# Altium PCB MyPro.PcbDoc
Units mil, origin at the board's own origin, x right, y up, seen from the top; angles counter-clockwise.
Board outline 2055 x 3355 mil, 2 copper layers (Top Layer, Bottom Layer); 76 components, 78 nets, 359 pads, 87 vias.
Unrouted connection lines stored in the file: 18.
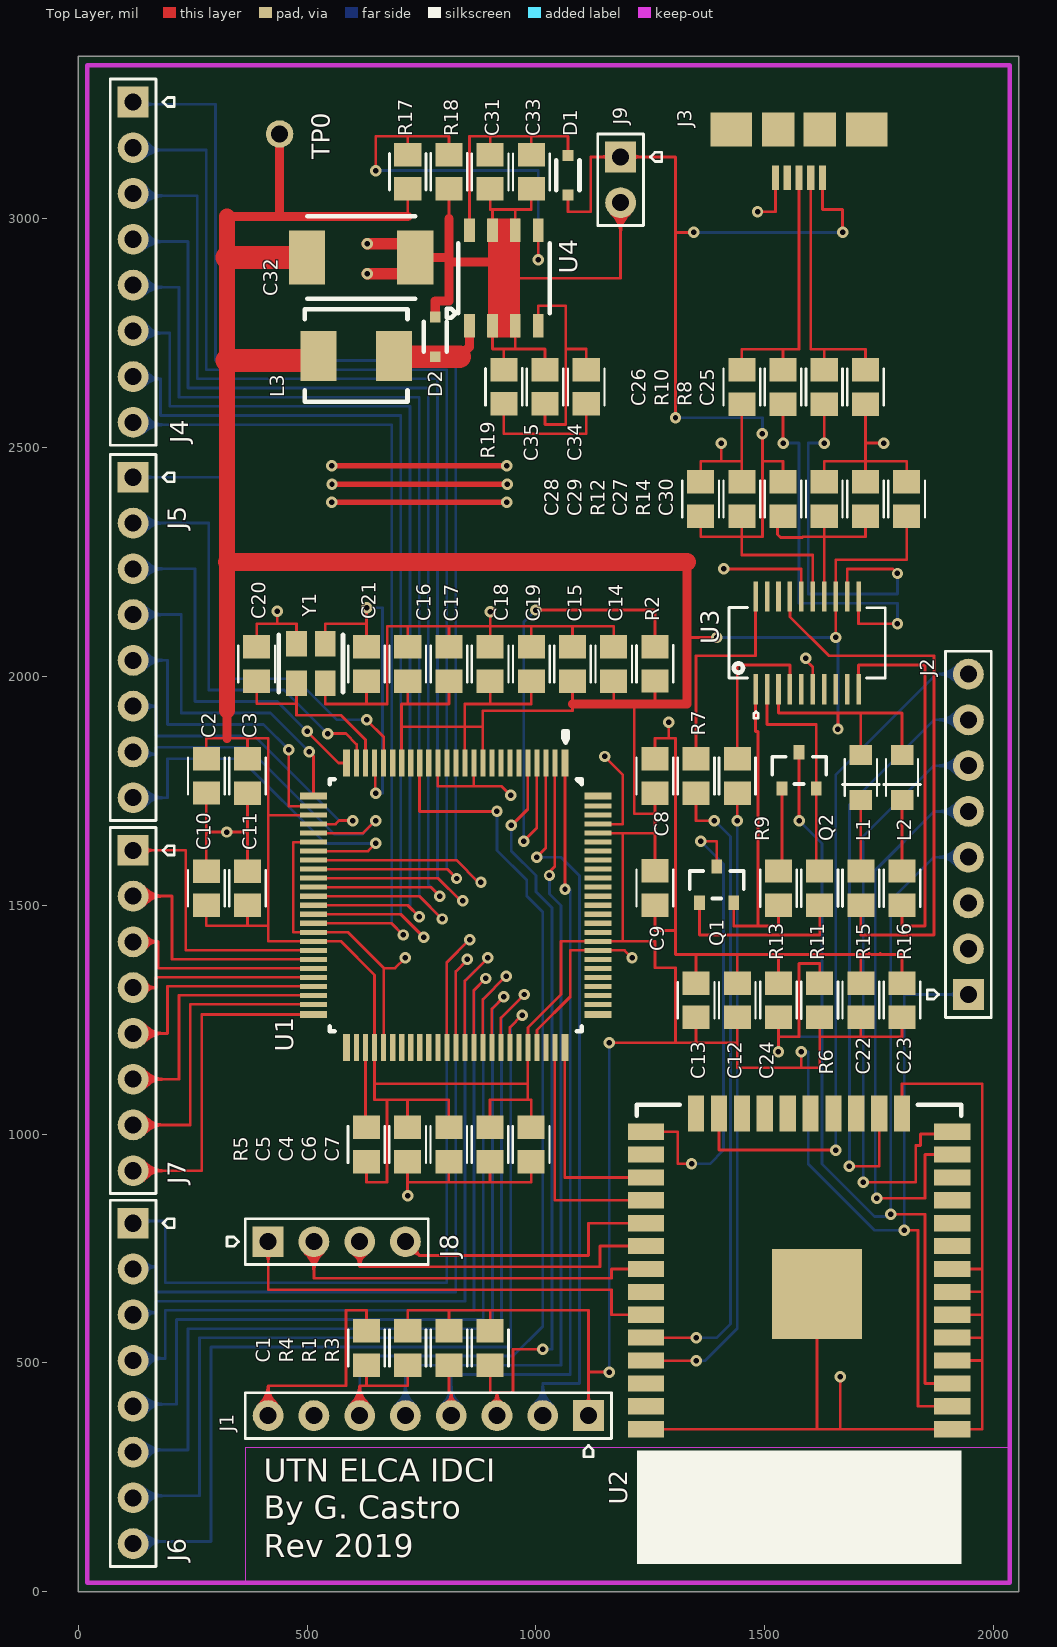
[diagram p0: Top Layer view]
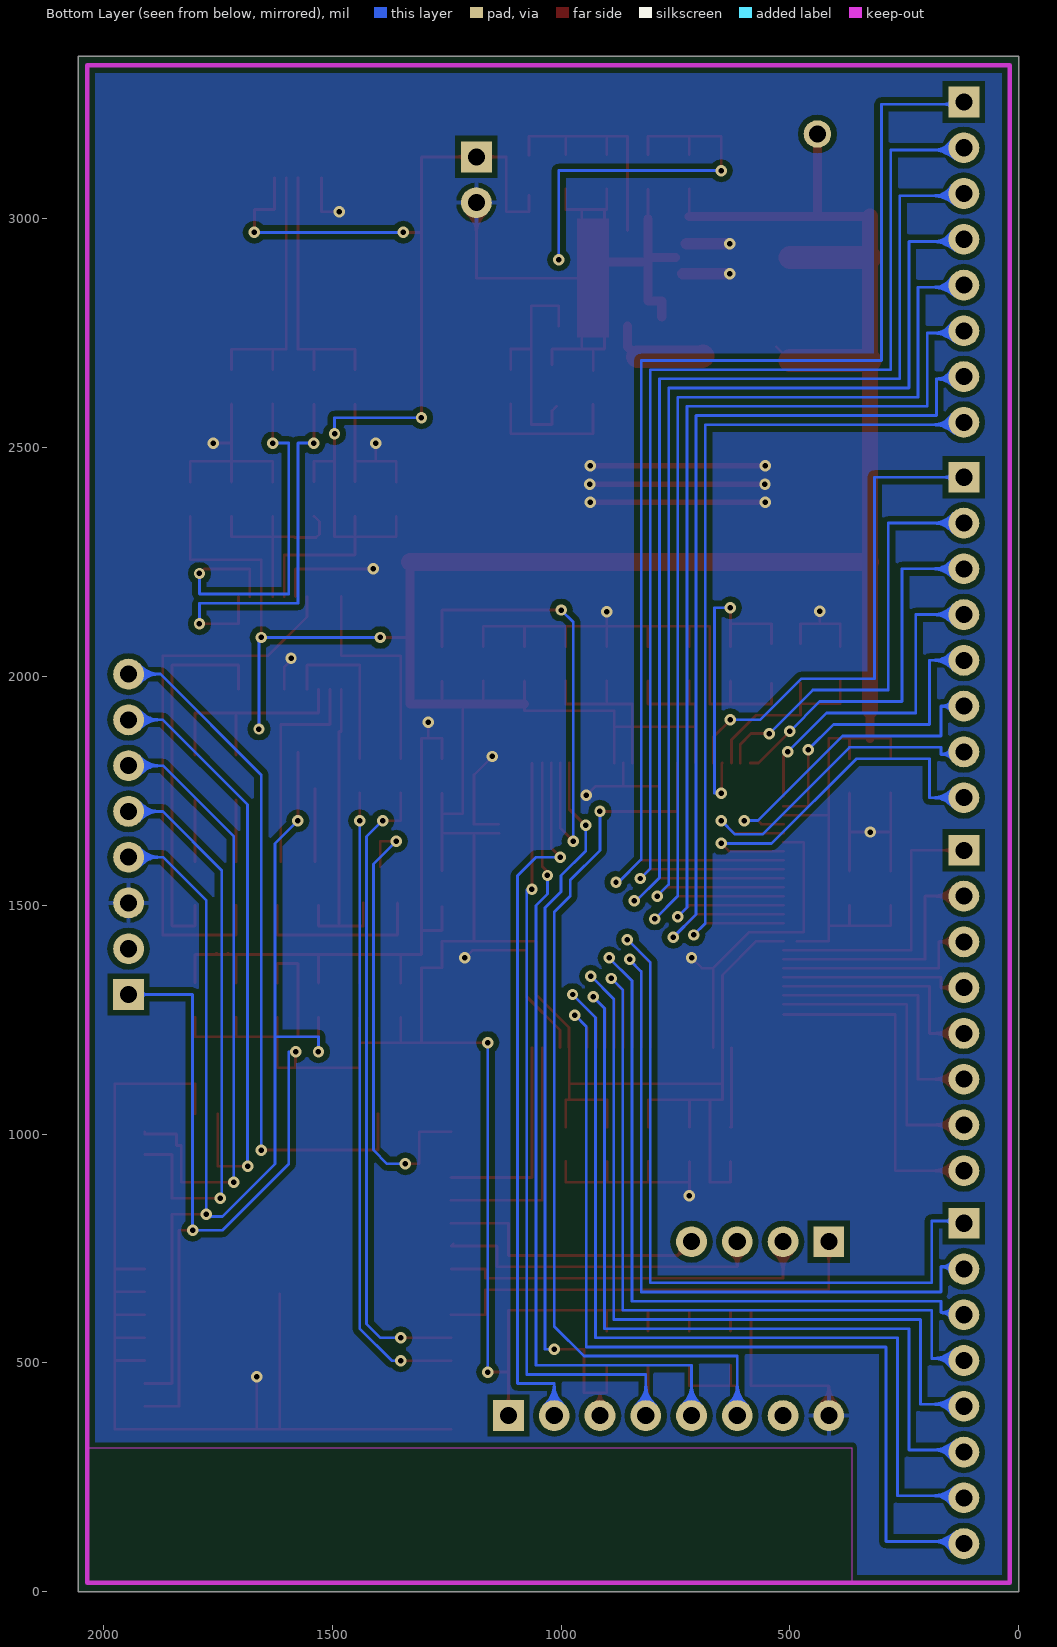
[diagram p1: Bottom Layer view, seen from below]

## Layer stack, top to bottom
Top Solder: solder mask 0.4, Solder Resist, Dk 3.5
Top Layer: signal copper 1.4
Dielectric 1: dielectric 12.6, FR-4, Dk 4.8
Bottom Layer: signal copper 1.4
Bottom Solder: solder mask 0.4, Solder Resist, Dk 3.5

## Board outline
0,0 2055,0 2055,3355 0,3355

## Design rules (kind name [scope] priority, off if disabled: settings)
Clearance Clearance_1 [All] p1: gap=6 ignorepadtopadclearanceinfootprint=FALSE except(12: Arc-Poly Track-Poly SMDPad-Poly THPad-Poly Via-Poly Fill-Poly Poly-Poly)
Clearance [All] p2: gap=6 ignorepadtopadclearanceinfootprint=FALSE
PolygonConnect MyPolygonConnect [isVia] p1: thpad.connectstyle=Relief thpad.reliefconductorwidth=10 thpad.reliefentries=4 thpad.polygonreliefangle="90 Angle" thpad.airgapwidth=10 smdpad.connectstyle=Relief smdpad.reliefconductorwidth=10 smdpad.reliefentries=4 smdpad.polygonreliefangle="90 Angle" smdpad.airgapwidth=10 via.connectstyle=Direct via.reliefconductorwidth=10 via.reliefentries=4 via.polygonreliefangle="90 Angle" via.airgapwidth=10
PolygonConnect [All] p2: connectstyle=Relief reliefconductorwidth=10 reliefentries=4 polygonreliefangle="90 Angle" airgapwidth=10
RoutingVias [All] p1: holewidth=12 width=25 viastyle="Through Hole" minholewidth=12 minwidth=25 maxholewidth=12 maxwidth=25
SilkToSolderMaskClearance [IsPad] p1: minsilkscreentomaskgap=6 clearancetoexposedcopper=TRUE
SolderMaskExpansion [All] p1: expansion=4
Width [All] p1: maxlimit=100 minlimit=6 preferedwidth=10
29 further rules are at their usual default settings.

## Classes and differential pairs
component class Perifericos: C31 C32 C33 C34 C35 D1 D2 J4 J5 J6 J7 J8 J9 L3 R17 R18 R19 TP0 U4
component class ESP32WROOM: C22 C23 C24 C25 C26 C27 C28 C29 C30 J2 J3 L1 L2 Q1 Q2 R6 R7 R8 R9 R10 R11 R12 R13 R14 R15 R16 U2 U3
component class LPC1769: C1 C2 C3 C4 C5 C6 C7 C8 C9 C10 C11 C12 C13 C14 C15 C16 C17 C18 C19 C20 C21 J1 R1 R2 R3 R4 R5 U1 Y1

## Components (designator, comment, footprint, x,y, rotation, side; value= is the part's Value field where it differs from the comment)
C1 "100nF 16V Y5R" C_0805 630,532.6 r90 top
C2 "100nF 16V Y5R" C_0805 280,1782.6 r270 top
C3 "10nF 16V Y5R" C_0805 370,1782.4 r270 top
C4 "100nF 16V Y5R" C_0805 809.69,977.4 r270 top
C5 "10nF 16V Y5R" C_0805 719.69,977.4 r270 top
C6 "100nF 16V Y5R" C_0805 899.69,977.4 r270 top
C7 "10nF 16V Y5R" C_0805 989.69,977.4 r270 top
C8 "100nF 16V Y5R" C_0805 1260,1782.4 r90 top
C9 "10nF 16V Y5R" C_0805 1260,1537.6 r270 top
C10 "100nF 16V Y5R" C_0805 280,1537.2 r90 top
C11 "10nF 16V Y5R" C_0805 370,1537.2 r90 top
C12 "100nF 16V Y5R" C_0805 1440,1292.4 r90 top
C13 "10nF 16V Y5R" C_0805 1350,1292.4 r90 top
C14 "100nF 16V Y5R" C_0805 1170,2027.2 r90 top
C15 "10nF 16V Y5R" C_0805 1080,2027.2 r90 top
C16 "100nF 16V Y5R" C_0805 720,2027.2 r90 top
C17 "10nF 16V Y5R" C_0805 810,2027.2 r90 top
C18 "100nF 16V Y5R" C_0805 900,2027.2 r90 top
C19 "10nF 16V Y5R" C_0805 990,2027.2 r90 top
C20 "18pF 16V C0G" C_0805 390,2027.2 r90 top
C21 "18pF 16V C0G" C_0805 630,2027.2 r270 top
C22 "10uF 16V Y5R" C_0805 1710,1292.6 r90 top
C23 "100nF 16V Y5R" C_0805 1800,1292.6 r90 top
C24 "0.1uF 50V 10%" C_0805 1530,1292.6 r90 top
C25 "47pF 50V C0G" C_0805 1720,2632.4 r270 top
C26 "47pF 50V C0G" C_0805 1450,2632.4 r270 top
C27 "10nF 16V N7R" C_0805 1630,2387.4 r90 top
C28 "4.7uF 6.3V X5R" C_0805 1360,2387.4 r90 top
C29 "100nF 16V X7R" C_0805 1450,2387.4 r90 top
C30 "100nF 16V X7R" C_0805 1810,2387.4 r90 top
C31 "10uF 16V Y5R" C_0805 900,3102.4 r270 top
C32 "220uF 6.3V 20%" CT_2917_D 618.31,2915 r0 top
C33 "100nF 16V Y5R" C_0805 990,3102.4 r270 top
C34 "27nF 16V Y5R" C_0805 1110,2632.6 r270 top
C35 "330pF 16V C0G" C_0805 1020,2632.6 r90 top
D1 "BAT60J" SOD323 1070,3095 r90 top
D2 "BAT60J" SOD323 780,2741.69 r270 top
J1 "JTAG Header" HDRM_2.54MM_1X8 915,385 r180 top
J2 "JTAG Header_1" HDRM_2.54MM_1X8 1945,1505 r90 top
J3 "USB MICRO AB" USB_MICRO_F_AB 1574.72,3195 r180 top
J4 "JTAG Header_1" HDRM_2.54MM_1X8 120,3055 r270 top locked
J5 "JTAG Header_1" HDRM_2.54MM_1X8 120,2235 r270 top
J6 "JTAG Header_1" HDRM_2.54MM_1X8 120,605.31 r270 top
J7 "JTAG Header_1" HDRM_2.54MM_1X8 120,1420 r270 top
J8 "Connector" HDRM_0.1_1X4 565,765 r0 top
J9 "Power Supply" HDRM_0.1_1X2 1185,3035 r270 top
L1 "Green" LED_0805 1710,1779.02 r270 top
L2 "Red" LED_0805 1800,1779.02 r270 top
L3 "8.2uH 20%" 1R5_1710 607.32,2700 r180 top
Q1 "TBJ" SOT-23 1395,1544.8 r0 top
Q2 "TBJ" SOT-23 1575,1794.8 r0 top
R1 "10KΩ 1%" R_0805 810,532.6 r90 top
R2 "10KΩ 1%" R_0805 1260,2027.4 r270 top
R3 "10KΩ 1%" R_0805 900,532.6 r90 top
R4 "10KΩ 1%" R_0805 720,532.6 r90 top
R5 "10KΩ 1%" R_0805 629.69,977.4 r90 top
R6 "10K 5%" R_0805 1620,1292.6 r270 top
R7 "1K 5%" R_0805 1350,1782.4 r270 top
R8 "27R 5%" R_0805 1630,2632.4 r270 top
R9 "1K 5%" R_0805 1440,1782.4 r270 top
R10 "27R 5%" R_0805 1540,2632.4 r270 top
R11 "12K 1%" R_0805 1620,1537.4 r270 top
R12 "10K 5%" R_0805 1540,2387.4 r270 top
R13 "12K 1%" R_0805 1530,1537.4 r90 top
R14 "15K 5%" R_0805 1720,2387.4 r90 top
R15 "470R 5%" R_0805 1710,1537.4 r90 top
R16 "470R 5%" R_0805 1800,1537.4 r90 top
R17 "9.1KΩ 1%" R_0805 720,3102.4 r270 top
R18 "5.49KΩ 1%" R_0805 810,3102.4 r90 top
R19 "3.6KΩ 1%" R_0805 930,2632.6 r270 top
TP0 "TestPoint" TestPoint 440,3185 r90 top
U1 "LPC1769" LQFP100 825,1500 r270 top
U2 "ESP32WROOM" "ESP32_WROOM - DUPLICATE" 1575,700 r180 top
U3 "FT231XS" SSOP_20 1592.5,2073.3 r90 top
U4 "A5972D" SO_8 930,2870 r90 top
Y1 "ABM8W 12MHz" ABM8W 508.5,2028.11 r90 top

## Footprints (in the part's own frame and the unit in brackets; to place one, negate y for a bottom-side part, rotate by r counter-clockwise, add the part's x,y. Pads: shape width x height; smd on the part's side, far side on the other; paste and mask are expansions set on the pad)
1R5_1710 [mm] "SRP5020TA Inductor"
  rect 2x2.8 smd: 1(-2.1,0) 2(2.1,0)
  silkscreen extent -2.85,-2.6 2.85,2.54, body extent -3,-2.85 3,2.85, height 2.65
ABM8W [mm] "Crystal"
  rect 1.4x1.15 smd: 1(-1.1,0.8) 2(1.1,-0.8) 3(-1.1,-0.8) 3(1.1,0.8)
  silkscreen extent -1.6,-1.78 1.6,1.78, body extent -1.6,-1.25 1.6,1.25, height 0.75
C_0805 [mm] "MLCC Chip Capacitor"
  rect 1.3x1.5 smd: 1(-0.95,0) 2(0.95,0)
  silkscreen extent -1.02,-1.02 1.02,1.02, body extent -1,-0.62 1,0.63, height 0.78
CT_2917_D [mm] "Capacitor Tantalum AVX D Case"
  rect 2x3 smd: 1(-3,0) 2(3,0)
  silkscreen extent -3,-2.29 3,2.29, body extent -3.7,-2.22 3.7,2.23, height 3.01
"ESP32_WROOM - DUPLICATE" [mm]
  rect 2x0.9 smd mask+0.102: 1(-8.5,8.755) 2(-8.5,7.485) 3(-8.5,6.215) 4(-8.5,4.945) 5(-8.5,3.675) 6(-8.5,2.405) 7(-8.5,1.135) 8(-8.5,-0.135) 9(-8.5,-1.405) 10(-8.5,-2.675) 11(-8.5,-3.945) 12(-8.5,-5.215) 13(-8.5,-6.485) 14(-8.5,-7.755) 25(8.5,-7.755) 26(8.5,-6.485) 27(8.5,-5.215) 28(8.5,-3.945) 29(8.5,-2.675) 30(8.5,-1.405) 31(8.5,-0.135) 32(8.5,1.135) 33(8.5,2.405) 34(8.5,3.675) 35(8.5,4.945) 36(8.5,6.215) 37(8.5,7.485) 38(8.5,8.755)
  rect 0.9x2 smd mask+0.102: 15(-5.715,-8.755) 16(-4.445,-8.755) 17(-3.175,-8.755) 18(-1.905,-8.755) 19(-0.635,-8.755) 20(0.635,-8.755) 21(1.905,-8.755) 22(3.175,-8.755) 23(4.445,-8.755) 24(5.715,-8.755)
  rect 5x5 smd: 39(-1,1.255)
  silkscreen extent -9,-9.25 9,16.24, body extent -9.07,-9.25 9,16.28, height 3
HDRM_0.1_1X2 [mm]
  rect 1.71x1.71 hole 0.95: 1(-2.54,0)
  round 1.71 hole 0.95: 2(0,0)
  silkscreen extent -3.81,-1.27 1.27,2.29
HDRM_0.1_1X4 [mm] "Header Male 100mils 4 pins"
  rect 1.71x1.71 hole 0.95: 1(-3.81,0)
  round 1.71 hole 0.95: 2(-1.27,0) 3(1.27,0) 4(3.81,0)
  silkscreen extent -6.1,-1.27 5.08,1.27, body extent -5.08,-1.27 5.08,1.27, height 9.2
HDRM_2.54MM_1X8 [mm]
  rect 1.71x1.71 hole 0.95: 1(-5.08,0)
  round 1.71 hole 0.95: 2(-2.54,0) 3(0,0) 4(2.54,0) 5(5.08,0) 6(7.62,0) 7(10.16,0) 8(12.7,0)
  silkscreen extent -6.35,-1.27 13.97,2.29, body extent -6.35,-1.27 13.97,1.27, height 9.2
LED_0805 [mm] "SMD LED"
  rect 1.1x1.25 smd: 1(-1.25,0) 2(1.25,0)
  silkscreen extent -1.02,-1.02 1.02,1.02, body extent -1.02,-0.46 1.04,0.45, height 0.85
LQFP100 [mm]
  rect 1.5x0.4 smd: 1(-7.9,6.06) 25(-7.9,-6.06) 51(7.9,-6.06) 75(7.9,6.06)
  rect 1.5x0.28 smd: 2(-7.9,5.5) 3(-7.9,5) 4(-7.9,4.5) 5(-7.9,4) 6(-7.9,3.5) 7(-7.9,3) 8(-7.9,2.5) 9(-7.9,2) 10(-7.9,1.5) 11(-7.9,1) 12(-7.9,0.5) 13(-7.9,0) 14(-7.9,-0.5) 15(-7.9,-1) 16(-7.9,-1.5) 17(-7.9,-2) 18(-7.9,-2.5) 19(-7.9,-3) 20(-7.9,-3.5) 21(-7.9,-4) 22(-7.9,-4.5) 23(-7.9,-5) 24(-7.9,-5.5) 52(7.9,-5.5) 53(7.9,-5) 54(7.9,-4.5) 55(7.9,-4) 56(7.9,-3.5) 57(7.9,-3) 58(7.9,-2.5) 59(7.9,-2) 60(7.9,-1.5) 61(7.9,-1) 62(7.9,-0.5) 63(7.9,0) 64(7.9,0.5) 65(7.9,1) 66(7.9,1.5) 67(7.9,2) 68(7.9,2.5) 69(7.9,3) 70(7.9,3.5) 71(7.9,4) 72(7.9,4.5) 73(7.9,5) 74(7.9,5.5)
  rect 0.4x1.5 smd: 26(-6.06,-7.9) 50(6.06,-7.9) 76(6.06,7.9) 100(-6.06,7.9)
  rect 0.28x1.5 smd: 27(-5.5,-7.9) 28(-5,-7.9) 29(-4.5,-7.9) 30(-4,-7.9) 31(-3.5,-7.9) 32(-3,-7.9) 33(-2.5,-7.9) 34(-2,-7.9) 35(-1.5,-7.9) 36(-1,-7.9) 37(-0.5,-7.9) 38(0,-7.9) 39(0.5,-7.9) 40(1,-7.9) 41(1.5,-7.9) 42(2,-7.9) 43(2.5,-7.9) 44(3,-7.9) 45(3.5,-7.9) 46(4,-7.9) 47(4.5,-7.9) 48(5,-7.9) 49(5.5,-7.9) 77(5.5,7.9) 78(5,7.9) 79(4.5,7.9) 80(4,7.9) 81(3.5,7.9) 82(3,7.9) 83(2.5,7.9) 84(2,7.9) 85(1.5,7.9) 86(1,7.9) 87(0.5,7.9) 88(0,7.9) 89(-0.5,7.9) 90(-1,7.9) 91(-1.5,7.9) 92(-2,7.9) 93(-2.5,7.9) 94(-3,7.9) 95(-3.5,7.9) 96(-4,7.9) 97(-4.5,7.9) 98(-5,7.9) 99(-5.5,7.9)
  silkscreen extent -9.65,-7 7,7, body extent -8,-8 8,8, height 1.6
R_0805 [mm] "MLCC Chip Resistor"
  rect 1.3x1.5 smd: 1(-0.95,0) 2(0.95,0)
  silkscreen extent -1.02,-1.02 1.02,1.02, body extent -1,-0.63 1,0.63, height 0.43
SO_8 [mm] "SOT96-1 (NXP)"
  rect 1.3x0.6 smd: 1(-2.65,1.905) 2(-2.65,0.635) 3(-2.65,-0.635) 4(-2.65,-1.905) 5(2.65,-1.905) 6(2.65,-0.635) 7(2.65,0.635) 8(2.65,1.905)
  silkscreen extent -2.2,-2.54 1.95,3.17, body extent -3.02,-2.45 3.02,2.45, height 1.6
SOD323 [mm]
  rect 0.6x0.6 smd: 1(-1.1,0) 2(1.1,0)
  silkscreen extent -0.83,-0.64 0.83,0.64, body extent -1.3,-0.67 1.3,0.68, height 1.1
SOT-23 [mm]
  rect 0.6x0.8 smd: 1(-0.95,-1.01) 2(0.95,-1.01) 3(0,1.01)
  silkscreen extent -1.5,-0.76 1.5,0.76, body extent -1.5,-1.25 1.5,1.25, height 1.05
SSOP_20 [mil] "USB to UART I.C."
  rect 66x10 smd: 1(-101.5,112.5) 2(-101.5,87.5) 3(-101.5,62.5) 4(-101.5,37.5) 5(-101.5,12.5) 6(-101.5,-12.5) 7(-101.5,-37.5) 8(-101.5,-62.5) 9(-101.5,-87.5) 10(-101.5,-112.5) 11(101.5,-112.5) 12(101.5,-87.5) 13(101.5,-62.5) 14(101.5,-37.5) 15(101.5,-12.5) 16(101.5,12.5) 17(101.5,37.5) 18(101.5,62.5) 19(101.5,87.5) 20(101.5,112.5)
  silkscreen extent -165,-170 77,170, body extent -156,-144 156,144, height 140
TestPoint [mil]
  round 60 hole 37.4: 1(0,0)
USB_MICRO_F_AB [mm]
  rect 0.4x1.35 smd: 1(-1.3,2.675) 2(-0.65,2.675) 3(0,2.675) 4(1.3,2.675) 5(0.65,2.675)
  rect 2.3x1.9 smd: 6(-3.75,0) 7(3.75,0)
  rect 1.8x1.9 smd: 8(-1.15,0) 9(1.15,0)
  body extent -4.1,-2.88 4.1,3.05, height 2.72

## Part data
C1 C2 C3 C4 C5 C6 C7 C8 C9 C10 C11 C12 C13 C14 C15 C16 C17 C18 C19 C20 C21 C22 C23 C24 C25 C26 C27 C28 C29 C30 C31 C33 C34 C35: library part Capacitor, "Capacitor"
C32: library part "Polarized Capacitor"
D1 D2: library part Diode, "Generic Diode"
J3: library part Connectorx6, Parameter 1=0480370001
J4 J5 J6 J7: library part Connector1x8
J8: library part Connectorx4
J9: library part "Power Connector"
L1: library part Led_G, "Green LED"
L2: library part Led_R, "Red LED"
L3: library part Inductor, "Inductor"
Q1 Q2: library part TBJ_NPN
R1 R2 R3 R4 R5 R6 R7 R8 R9 R10 R11 R12 R13 R14 R15 R16 R17 R18 R19: library part Resistor, "Resistor"
U1: "32 bit ARM Cortex M3"
U4: "Fuente Switching 3.3v 1.5A"
Y1: library part Crystal, "Crystal"

## Via types
v1: diameter 25, hole 12, Top Layer to Bottom Layer, tented both sides, 83 vias
v2: diameter 25, hole 12, Top Layer to Bottom Layer, tented top, 4 vias

## Nets (pads, with @x,y where several pads share a name; then routed paths per layer and width w, separated by ;. In a path a pad name is that pad's centre, name@x,y a point inside that pad or via, vN(x,y) a via of type N, cw(c..) or ccw(c..) an arc to the next point about the centre after c; other vN are vias at no path point)
3.3V: C2.1 C3.1 C4.1 C5.1 C6.1 C7.1 C8.1 C9.1 C10.1 C11.1 C12.1 C13.1 C14.1 C15.1 C16.1 C17.1 C18.1 C19.1 C22.1 C23.1 C30.1 C32.1 J1.1 J2.1 L1.1 L2.1 L3.2 R1.2 R2.2 R3.2 R4.2 R5.1 R6.2 R17.2 TP0.1 U1.10 U1.12 U1.19 U1.28 U1.42 U1.54 U1.71 U1.84 U1.96 U2.2 U3.3 U3.13 | length 15077
  Top Layer w6: C10.1 280,1455 370,1455 ; C2.1@280,1819.8 280,1865 325,1865 370,1865 ; C11.1 370,1455 ; C3.1 370,1865 ; U1.42@485,1421.26 460,1421.26 459.8,1421.06 415,1421.06 415,1455 ; L3.2@499.65,2690 L3.2@529.65,2720 ; U1.28@513.66,1696.65 415,1696.65 ; U1.42 573.74,1421.26 647.52,1347.48 647.52,1110 ; R5.1 629.69,894.8 674.69,894.8 674.69,1074.8 ; U1.19@706.57,1810.83 706.57,1890 ; C5.1 719.69,1074.8 ; R17.2@719.69,3065 R17.2 720,3005 ; R4.2 720,615 810,615 ; C16.1 720,1939.8 ; C4.1 809.69,1074.8 719.69,1074.8 ; R1.2 810,615 ; C17.1 810,1939.8 720,1939.8 ; U1.12@844.37,1810.83 844.37,1890 ; U1.10@883.74,1810.83 883.74,1890 ; C6.1 899.69,1074.8 982.17,1074.8 ; R3.2 900,615 ; C18.1 900,1939.8 ; U1.71@982.17,1188.78 982.17,1110 ; U1.71 982.48,1232.48 1055,1305 1055,1421.26 U1.84 ; C7.1 989.69,1074.8 982.17,1074.8 ; C19.1 990,1939.8 900,1939.8 ; C15.1 1080,1939.8 1080,1924.8 883.74,1924.8 883.74,1890 ; J1.1 1115,615 900,615 ; 1115,480 v1(1160,480) ; U1.84@1135.71,1421.06 1190,1421.06 ; U1.96@1135.71,1657.28 1190,1657.28 ; v1(1160,1200) 1160,1199.8 1305,1199.8 ; 1170,1939.8 C14.1 ; 1215,1939.8 1215,1700 1260,1700 ; C9.1 1260,1657.28 ; C8.1 1260,1700 ; 1260,1939.8 1260,1940 R2.2 ; 1330,2085 v1(1395,2085) ; C13.1 1350,1199.8 ; C12.1 1440,1199.8 ; U3.3 1530,1919.8 1660,1919.8 ; v1(1580,1180) 1580,1145 ; R6.2 1620,1212.6 ; v1(1655,2085) U3.13 1655,2254.8 1810,2254.8 C30.1 ; v1(1660,1885) 1660,1919.8 ; C22.1 1710,1212.6 ; L1.1 1710,1919.8 ; C23.1 1800,1212.6 1710,1212.6 ; L2.1 1800,1919.8 1710,1919.8 ; v1(1805,790) 1835,790 1835,405.31 U2.2 ; 370,1455 415,1455 ; 370,1865 415,1865 415,1696.65 ; 415,1455 415,1696.65 ; 647.52,1110 647.52,1074.8 674.69,1074.8 ; 647.52,1110 982.17,1110 ; 674.69,1074.8 719.69,1074.8 ; 706.57,1890 706.57,1939.8 720,1939.8 ; 706.57,1890 844.37,1890 ; 810,615 900,615 ; 844.37,1890 883.74,1890 ; 844.37,1890 844.37,1939.8 900,1939.8 ; 982.17,1074.8 982.17,1110 ; 1190,1421.06 1190,1657.28 ; 1190,1421.06 1260,1421.06 1260,1363.66 1305,1363.66 1305,1199.8 ; 1190,1657.28 1260,1657.28 ; 1260,1657.28 1260,1700 ; 1305,1199.8 1350,1199.8 ; 1350,1199.8 1440,1199.8 ; 1440,1199.8 1440,1145 1580,1145 ; 1580,1145 1620,1145 1620,1212.6 ; 1620,1212.6 1710,1212.6 ; 1660,1919.8 1710,1919.8
  Top Layer w20: 325,1865 325,1925 ; 325,3005 440,3005 ; TP0.1 440,3005 ; 720,3005 440,3005 ; 1080,1939.8 1170,1939.8 1215,1939.8 1260,1939.8 ; 1260,1940 1330,1940 1330,2085 1330,2250
  Top Layer w35: 325,1925 325,2250 325,2690 325,2915 325,3005
  Top Layer w40: 325,2250 1330,2250
  Top Layer w50: 325,2690 L3.2@499.65,2690 ; 325,2915 C32.1
  Bottom Layer w6: v1(1160,480) v1(1160,1200) ; v1(1395,2085) v1(1655,2085) 1660,2085 v1(1660,1885) ; v1(1580,1180) 1595,1180 1595,935 1740,790 v1(1805,790) 1805,1305 J2.1
5V: C28.1 C29.1 D1.1 J3.1 J9.1 R12.1 U3.15 | length 2541.1
  Top Layer w6: D1.1 1070,3015 1120,3015 1120,3135 J9.1 1305,3135 1305,2970 ; v1(1305,2565) 1305,2970 ; v1(1345,2970) 1305,2970 ; C28.1 1360,2304.8 1450,2304.8 ; C29.1 1450,2304.8 ; v1(1495,2530) 1495,2469.8 ; R12.1 1540,2469.8 1495,2469.8 ; U3.15 1605,2265 1450,2265 1450,2304.8 ; J3.1 1625.91,3020 1670,3020 v1(1670,2970) ; 1450,2304.8 1495,2304.8 1495,2469.8
  Bottom Layer w6: v1(1305,2565) 1495,2565 v1(1495,2530) ; v1(1345,2970) v1(1670,2970)
EN: C24.1 J2.4 Q2.3 R6.1 U2.3 | length 3005.1
  Top Layer w6: v1(1530,1180) 1530,1212.6 ; C24.1 1530,1212.6 ; v1@1575,1694.8 Q2.3 ; R6.1 1620,1372.6 1575,1372.6 1575,1212.6 1530,1212.6 ; v1(1775,825) 1850,825 1850,455 1889.96,455 1889.65,455.31 U2.3
  Bottom Layer w6: v1(1530,1180) 1530,1212.6 1625,1212.6 ; v1(1575,1684.8) 1625,1634.8 1625,1212.6 ; J2.4 1870,1605 1775,1510 v1(1775,825) 1770,820 1740,820 1625,935 1625,1212.6
GND: C1.2 C2.2 C3.2 C4.2 C5.2 C6.2 C7.2 C8.2 C9.2 C10.2 C11.2 C12.2 C13.2 C14.2 C15.2 C16.2 C17.2 C18.2 C19.2 C20.2 C21.2 C22.2 C23.2 C24.2 C25.2 C26.2 C27.2 C28.2 C29.2 C30.2 C31.2 C32.2 C33.2 C35.2 D2.1 J1.8 J2.3 J3.4 J9.2 R14.2 R18.1 R19.1 U1.11 U1.15 U1.31 U1.41 U1.55 U1.72 U1.83 U1.97 U2.1 U2.4 U2.5 U2.6 U2.7 U2.8 U2.15 U2.38 U2.39 U3.6 U3.16 U4.2 U4.3 U4.6 U4.7 Y1.3 | length 12789.8
  Top Layer w6: C10.2 280,1660 ; C2.2@280,1745 280,1660 ; C11.2 370,1660 ; C3.2 370,1660 ; C20.2 390,2114.8 435,2114.8 ; J1.8 415,450 585,450 585,615 630,615 C1.2 ; v1(435,2142.78) 435,2114.8 ; Y1.3@477.01,2071.42 477.01,2114.8 435,2114.8 ; U1.31 470,1637.8 470,1440.94 U1.41 589.06,1440.94 667.52,1362.48 ; Y1.3@540,1984.8 540,1939.8 630,1939.8 ; C21.2 630,1939.8 ; U1.55 667.52,1362.48 ; v1(715,1385) 692.48,1362.48 667.52,1362.48 ; C5.2 719.69,894.8 ; v1(720,865) 719.69,865 719.69,894.8 ; C16.2 720,2109.8 ; U1.15 785.63,1760 925,1760 v1(945,1740) ; C4.2 809.69,894.8 ; C17.2 810,2109.8 ; 810,2905 810,2915 ; 810,3000 R18.1 ; 864.37,1760 U1.11 ; C6.2 899.69,894.8 ; C18.2 900,2109.8 ; v1(900,2141.49) 900,2109.8 ; C31.2 900,3020 905,3020 ; R19.1@929.8,2668.23 929.8,2715.2 905,2715.2 U4.2 905,2905 U4.7 905,3020 ; 930,2715.2 1020,2715.2 C35.2@1020,2680.2 ; 955,2715.2 U4.3 955,2870 ; C7.2 989.69,894.8 899.69,894.8 ; C19.2 990,2109.8 ; C33.2 990,3020 955,3020 ; U1.72 1002.17,1227.17 1075,1300 1075,1401.57 U1.83 1193.43,1401.57 v1(1210,1385) ; C15.2 1080,2109.8 ; U1.97 1190,1677.17 1190,1785 v1(1150,1825) ; C14.2 1170,2109.8 1080,2109.8 ; J9.2@1185,3030 1185,2870 955,2870 ; U2.38 1614.37,355.31 ; C9.2@1260,1497.4 1260,1445 1305,1445 ; C8.2 1260,1865 1290,1865 ; v1(1290,1900) 1290,1865 ; C13.2 1350,1392.6 ; C28.2 1360,2469.8 1405,2469.8 ; v1(1405,2509.8) 1405,2469.8 ; v1(1410,2234.8) 1580,2234.8 U3.16 ; C12.2 1440,1392.6 ; C29.2 1450,2469.8 ; C26.2 1450,2469.8 ; v1(1484.19,3015) 1523.54,3015 J3.4 ; C24.2 1530,1392.6 ; v1(1590,2040) 1589.99,2035.01 1605,2020 U3.6 ; U2.39 1614.37,355.31 ; C27.2 1630,2469.8 1720,2469.8 ; v1(1665,470) 1665,355.31 ; C22.2 1710,1392.6 ; R14.2 1720,2469.8 ; C25.2 1720,2509.8 ; 1727.6,1395 1730,1392.6 ; 1752.6,1395 1755,1392.6 ; v1(1760,2509.8) 1720,2509.8 ; U2.15 1800,1110 1975,1110 1975,705.31 ; C23.2 1800,1392.6 1755,1392.6 ; C30.2 1810,2469.8 1720,2469.8 ; U2.4 1975,505.31 ; U2.5 1975,555.31 ; U2.6 1975,605.31 ; U2.7 1975,655.31 ; U2.8 1975,705.31 ; 280,1660 v1(325,1660) 370,1660 ; 630,1939.8 675,1939.8 675,2109.8 720,2109.8 ; 719.69,894.8 809.69,894.8 ; 720,2109.8 810,2109.8 ; 809.69,894.8 899.69,894.8 ; 810,2109.8 900,2109.8 ; 900,2109.8 990,2109.8 ; 905,3020 955,3020 ; 955,2870 U4.6 955,3020 ; 990,2109.8 1080,2109.8 ; 1290,1865 1305,1865 1305,1392.6 1350,1392.6 ; 1350,1392.6 1440,1392.6 ; 1405,2469.8 1450,2469.8 ; 1440,1392.6 1530,1392.6 ; 1530,1392.6 1710,1392.6 ; 1614.37,355.31 1665,355.31 ; 1665,355.31 U2.1 1975,355.31 1975,505.31 ; 1710,1392.6 1755,1392.6 ; 1720,2469.8 1720,2509.8 ; 1975,505.31 1975,555.31 ; 1975,555.31 1975,605.31 ; 1975,605.31 1975,655.31 ; 1975,655.31 1975,705.31
  Top Layer w12: v2(553.58,2380) v1(936.42,2380) ; v2(553.74,2460) v1(936.57,2460) ; v2(554.53,2420) v1(937.36,2420)
  Top Layer w20: C32.2@750,2915 810,2915 810,3000 ; D2.1 780,2820 810,2820 810,2905 905,2905
  Top Layer w25: v1(631.42,2880) C32.2@733.92,2880 ; v1(631.42,2945) C32.2@726.42,2945
IO0: Q1.3 U2.25 | length 1038.5
  Top Layer w6: U2.25 1310,1005.31 1310,935 v1(1340,935) ; v1(1360,1640) 1395,1640 Q1.3
  Bottom Layer w6: v1(1340,935) 1380,935 1410,965 1410,1590 v1(1360,1640)
NetC1_1: C1.1 J1.6 R4.1 U1.17 | length 2258.6
  Top Layer w6: J1.6 615,450 630,450 ; C1.1 630,450 ; R4.1 720,450 630,450 ; U1.17@745.94,1810.83 745.94,1705 v1(915,1705)
  Bottom Layer w6: J1.6 615,515 950,515 1015,580 1015,1485 980,1520 980,1555 915,1620 v1(915,1705)
NetC20_1: C20.1 U1.23 Y1.1 | length 430.3
  Top Layer w6: C20.1 390,1940 477.01,1940 ; Y1.1 477.01,1940 ; U1.23@627.83,1810.83 627.83,1861.54 574.37,1915 477.01,1915 477.01,1940
NetC21_1: C21.1 U1.22 Y1.2 | length 741.1
  Top Layer w6: Y1.2 540,2114.8 630,2114.8 ; C21.1 630,2114.8 ; v1(630,2150) 630,2114.8 ; U1.22 648.92,1809.94 648.92,1745.89 v1(650,1744.8)
  Bottom Layer w6: v1(630,2150) 665,2150 665,1744.8 v1(650,1744.8)
NetC25_1: C25.1 J3.2 R8.1 | length 584.6
  Top Layer w6: J3.2 1600.31,2714.8 1630,2714.8 ; R8.1 1630,2714.8 ; C25.1 1720,2714.8 1630,2714.8
NetC26_1: C26.1 J3.3 R10.1 | length 590.2
  Top Layer w6: C26.1 1450,2714.8 1540,2714.8 ; R10.1 1540,2714.8 ; J3.3 1575,3089.68 1575,2714.8 1540,2714.8
NetC27_1: C27.1 R12.2 R14.1 U3.14 | length 460.4
  Top Layer w6: R12.2 1528,2338 1528,2310.44 1535.03,2303.41 1581.82,2303.41 1583.21,2304.8 1630,2304.8 ; U3.14 1630,2304.8 ; C27.1 1630,2304.8 ; R14.1 1720,2304.8 1630,2304.8
NetC31_1: C31.1 C33.1 D1.2 U4.8 | length 542.8
  Top Layer w6: U4.8 855,3180 900,3180 ; C31.1 900,3180 ; C33.1 990,3180 ; D1.2 1070,3180 990,3180 ; 900,3180 990,3180
NetC34_1: C34.1 C35.1 U4.4 | length 543.5
  Top Layer w6: U4.4 1005,2810 1065,2810 1065,2715.2 ; C35.1@1010,2590.2 1020,2580.2 1020,2550.2 1065,2550.2 1065,2715.2 ; C34.1 1110,2715.2 1065,2715.2
NetC34_2: C34.2 R19.2 | length 310
  Top Layer w6: R19.2 930,2530.2 1110,2530.2 C34.2
NetD2_2: D2.2 L3.1 U4.1 | length 220.3
  Top Layer w20: 833.39,2698.39 855,2720 U4.1
  Top Layer w50: L3.1 691.61,2698.39 D2.2 833.39,2698.39
NetJ1_2: J1.2 U1.3 | length 1584
  Top Layer w6: v1(1001.54,1604.8) 1021.54,1624.8 U1.3@1021.54,1810.83
  Bottom Layer w6: v1(1001.54,1604.8) 1054.69,1604.8 1095,1564.49 1095,455 1015,455 J1.2
NetJ1_3: J1.3 R3.1 U1.5 | length 1673.7
  Top Layer w6: R3.1 900,435 915,435 ; J1.3 915,435 ; v1(945.93,1674.8) 947.17,1674.8 982.17,1709.8 U1.5@982.17,1810.83 ; v2(1015,530) 950,530 950,435 915,435
  Bottom Layer w6: v1(945.93,1674.8) 945.93,1619.07 1000,1565 1000,1529.49 1035,1494.49 1035,530 v2(1015,530)
NetJ1_4: J1.4 R1.1 U1.1 | length 1811.4
  Top Layer w6: R1.1 810,435 815,435 J1.4 ; U1.1@1063.27,1810.83 1063.58,1810.51 v1(1063.58,1535)
  Bottom Layer w6: J1.4 815,475 1075,475 1075,1533.07 1073.07,1535 v1(1063.58,1535)
NetJ1_5: J1.5 U1.2 | length 1781.1
  Top Layer w6: v1(1029.69,1565) 1029.69,1573.27 1041.22,1584.8 U1.2@1041.22,1810.83
  Bottom Layer w6: J1.5 715,495 1055,495 1055,1499.49 1029.69,1524.8 v1(1029.69,1565)
NetJ2_5: J2.5 U2.13 | length 1235
  Top Layer w6: v1(1745,860) 1850,860 1850,955.31 U2.13 U2.13@1909.65,955
  Bottom Layer w6: v1(1745,860) 1741.49,863.51 1741.49,1576.49 1870,1705 J2.5
NetJ2_6: J2.6 U2.14 | length 1354.2
  Top Layer w6: v1(1715,895) 1830,895 1830,975 1840,975 1840,1000 1909.65,1000 U2.14
  Bottom Layer w6: v1(1715,895) 1715,1650 1870,1805 J2.6
NetJ2_7: J2.7 U2.16 | length 1306.3
  Top Layer w6: v1(1685,930) 1750,930 U2.16
  Bottom Layer w6: v1(1685,930) 1685,1720 1870,1905 J2.7
NetJ2_8: J2.8 U2.23 | length 1535.8
  Top Layer w6: U2.23 1400,965 v1(1655,965)
  Bottom Layer w6: v1(1655,965) 1655,1785 1875,2005 J2.8
NetJ4_1: J4.1 U1.33 | length 2816.8
  Top Layer w6: U1.33 826.57,1598.43 875,1550 v1(880,1550)
  Bottom Layer w6: J4.1@120,3250 300,3250 300,2690 825,2690 825,1600 875,1550 v1(880,1550)
NetJ4_2: J4.2 U1.34 | length 2606.5
  Top Layer w6: U1.34 806.26,1578.74 v1(826.57,1558.43)
  Bottom Layer w6: J4.2@120,3150 280,3150 280,2670 805,2670 805,1580 v1(826.57,1558.43)
NetJ4_3: J4.3 U1.35 | length 2577.1
  Top Layer w6: U1.35 785.94,1559.06 835,1510 v1(840,1510)
  Bottom Layer w6: J4.3@120,3050 260,3050 260,2650 785,2650 785,1560 835,1510 v1(840,1510)
NetJ4_4: J4.4 U1.36 | length 2369.4
  Top Layer w6: U1.36 770.63,1539.37 v1(790,1520)
  Bottom Layer w6: J4.4@120,2950 240,2950 240,2630 765,2630 765,1545 v1(790,1520)
NetJ4_5: J4.5 U1.37 | length 2327.3
  Top Layer w6: U1.37 745.31,1519.69 v1(795,1470)
  Bottom Layer w6: J4.5@120,2850 220,2850 220,2610 745,2610 745,1520 v1(795,1470)
NetJ4_6: J4.6 U1.38 | length 2129.7
  Top Layer w6: U1.38 720,1500 v1(745,1475)
  Bottom Layer w6: J4.6@120,2750 200,2750 200,2590 725,2590 725,1495 v1(745,1475)
NetJ4_7: J4.7 U1.39 | length 2087.6
  Top Layer w6: U1.39 704.68,1480.32 v1(755,1430)
  Bottom Layer w6: J4.7@120,2650 180,2650 180,2570 705,2570 705,1480 v1(755,1430)
NetJ4_8: J4.8 U1.40 | length 1897.6
  Top Layer w6: U1.40 684.37,1460.63 v1(710,1435)
  Bottom Layer w6: J4.8@120,2550 685,2550 685,1460.41 710.41,1435 v1(710,1435)
NetJ5_1: J5.1 U1.21 | length 1100.9
  Top Layer w6: v1(630,1905) 667.52,1867.48 U1.21
  Bottom Layer w6: J5.1@120,2445 130,2435 315,2435 315,1995 475,1995 565,1905 v1(630,1905)
NetJ5_2: J5.2 U1.24 | length 943
  Top Layer w6: v1(545,1875) 585,1875 608.46,1851.54 U1.24
  Bottom Layer w6: J5.2 285,2335 285,1970 450,1970 v1(545,1875)
NetJ5_3: J5.3 U1.25 | length 811.9
  Top Layer w6: v1(500,1880) 568.98,1811.02 U1.25
  Bottom Layer w6: J5.3 255,2235 255,1945 435,1945 v1(500,1880)
NetJ5_4: J5.4 U1.26 | length 735.3
  Top Layer w6: v1(505,1835) 513.98,1826.02 U1.26
  Bottom Layer w6: J5.4 225,2135 225,1920 420,1920 v1(505,1835)
NetJ5_5: J5.5 U1.27 | length 680.2
  Top Layer w6: v1(460,1840) 460,1716.54 U1.27
  Bottom Layer w6: J5.5 195,2035 195,1895 405,1895 v1(460,1840)
NetJ5_6: J5.6 U1.29 | length 720.9
  Top Layer w6: U1.29 562.17,1677.17 570,1685 v1(600,1685)
  Bottom Layer w6: J5.6@120,1925 J5.6 170,1935 170,1870 385,1870 570,1685 v1(600,1685)
NetJ5_7: J5.7 U1.30 | length 788.5
  Top Layer w6: U1.30 622.48,1657.48 v1(650,1685)
  Bottom Layer w6: J5.7 120,1830 170,1830 170,1845 370,1845 560,1655 620,1655 v1(650,1685)
NetJ5_8: J5.8 U1.32 | length 834.6
  Top Layer w6: U1.32 633.11,1618.11 v1(650,1635)
  Bottom Layer w6: J5.8 195,1735 195,1820 355,1820 540,1635 v1(650,1635)
NetJ6_1: J6.1 U1.62 | length 1847.3
  Top Layer w6: U1.62 805.32,1375.32 v1(855,1425)
  Bottom Layer w6: J6.1@120,810 190,810 190,675 805,675 805,1375 v1(855,1425)
NetJ6_2: J6.2 U1.63 | length 1700.5
  Top Layer w6: U1.63 825,1355 850,1380 v1(850,1381.89)
  Bottom Layer w6: J6.2@120,710 170,710 170,655 825,655 825,1355 850,1380 v1(850,1381.89)
NetJ6_3: J6.3 U1.64 | length 1737.6
  Top Layer w6: U1.64 844.69,1334.69 v1(895,1385)
  Bottom Layer w6: J6.3@120,610 170,610 170,635 845,635 845,1335 v1(895,1385)
NetJ6_4: J6.4 U1.65 | length 1747
  Top Layer w6: U1.65 864.37,1314.37 v1(890,1340)
  Bottom Layer w6: J6.4@120,510 190,510 190,615 865,615 865,1315 v1(890,1340)
NetJ6_5: J6.5 U1.66 | length 1897.8
  Top Layer w6: U1.66 884.06,1294.06 v1(935,1345)
  Bottom Layer w6: J6.5@120,410 215,410 215,595 885,595 885,1295 v1(935,1345)
NetJ6_6: J6.6 U1.67 | length 1907.3
  Top Layer w6: U1.67 903.74,1273.74 v1(930,1300)
  Bottom Layer w6: J6.6@120,310 240,310 240,575 905,575 905,1275 v1(930,1300)
NetJ6_7: J6.7 U1.68 | length 2058.1
  Top Layer w6: U1.68 923.43,1253.43 v1(975,1305)
  Bottom Layer w6: J6.7@120,210 265,210 265,555 925,555 925,1255 v1(975,1305)
NetJ6_8: J6.8 U1.69 | length 2067.5
  Top Layer w6: U1.69 943.11,1233.11 v1(970,1260)
  Bottom Layer w6: J6.8@120,110 290,110 290,535 945,535 945,1235 v1(970,1260)
NetJ7_1: J7.1 U1.43 | length 612.4
  Top Layer w6: J7.1 235,1620 235,1401.57 U1.43
NetJ7_2: J7.2 U1.44 | length 532.1
  Top Layer w6: J7.2 205,1520 205,1381.89 U1.44
NetJ7_3: J7.3 U1.45 | length 451.8
  Top Layer w6: J7.3 175,1420 175,1362.2 U1.45
NetJ7_4: J7.4 U1.46 | length 416.5
  Top Layer w6: J7.4 170,1320 170,1342.52 U1.46
NetJ7_5: J7.5 U1.47 | length 496.8
  Top Layer w6: J7.5 195,1220 195,1322.83 U1.47
NetJ7_6: J7.6 U1.48 | length 577.1
  Top Layer w6: J7.6 220,1120 220,1303.15 U1.48
NetJ7_7: J7.7 U1.49 | length 657.4
  Top Layer w6: J7.7 245,1020 245,1283.46 U1.49
NetJ7_8: J7.8 U1.50 | length 735.4
  Top Layer w6: J7.8 270,920 270,1261.42 U1.50
NetJ8_1: J8.1 U2.33 | length 985
  Top Layer w6: J8.1 415,660 1165.31,660 1165.31,605.31 U2.33
NetJ8_2: J8.2 U2.31 | length 825.7
  Top Layer w6: J8.2 515,685 1165.31,685 1165.31,705.31 U2.31
NetJ8_3: J8.3 U2.30 | length 732.3
  Top Layer w6: J8.3 615,710 1140,710 1140,755.31 U2.30 U2.30@1235.67,760
NetJ8_4: J8.4 U2.29 | length 608.1
  Top Layer w6: J8.4 745,735 1115,735 1115,805.31 U2.29
NetL1_2: L1.2 R15.2 | length 135
  Top Layer w6: R15.2@1710,1594.8 L1.2
NetL2_2: L2.2 R16.2 | length 135
  Top Layer w6: R16.2@1800,1594.8 L2.2
NetQ1_1: Q1.1 R11.2 | length 397.8
  Top Layer w6: Q1.1 1357.6,1434.8 1620,1434.8 R11.2
NetQ1_2: Q1.2 R13.1 U3.1 | length 715
  Top Layer w6: Q1.2 1432.4,1454.8 1485,1454.8 ; U3.1 1480,1879.8 1485,1879.8 1485,1454.8 ; R13.1 1530,1454.8 1485,1454.8
NetQ2_1: Q2.1 R13.2 | length 160.2
  Top Layer w6: R13.2@1537.6,1594.8 Q2.1
NetQ2_2: Q2.2 R11.1 U3.2 | length 484.4
  Top Layer w6: U3.2 1505,1895 1612.4,1895 Q2.2 R11.1@1612.4,1594.8
NetR2_1: R2.1 U1.4 | length 1039.2
  Top Layer w6: v1(973.27,1639.8) 1001.85,1668.39 U1.4@1001.85,1810.83 ; v1(1000,2145) 1259.8,2145 1260,2144.8 R2.1
  Bottom Layer w6: v1(973.27,1639.8) 973.27,2118.27 v1(1000,2145)
NetR5_2: R5.2 U1.53 | length 175.8
  Top Layer w6: U1.53@627.83,1188.78 627.83,1014.8 R5.2
NetR7_1: R7.1 U3.20 | length 485
  Top Layer w6: R7.1 1350,2045 1480,2045 U3.20
NetR7_2: R7.2 U2.34 | length 1411.4
  Top Layer w6: U2.34 v1(1350,555.31) ; R7.2 1350,1684.8 v1(1390,1684.8)
  Bottom Layer w6: v1(1350,555.31) 1395.31,555.31 1425,585 1425,1649.8 v1(1390,1684.8)
NetR9_1: R9.1 U3.4 | length 373
  Top Layer w6: R9.1 1440,2024.8 1555,2024.8 U3.4
NetR9_2: R9.2 U2.35 | length 1399
  Top Layer w6: U2.35 1240.35,505 v1(1350,505) ; v1(1440,1684.8) R9.2
  Bottom Layer w6: v1(1350,505) 1370,505 1440,575 v1(1440,1684.8)
NetR15_1: R15.1 U3.17 | length 1230.4
  Top Layer w6: U3.17 1555,2130 1640,2045 1870,2045 1870,1434.8 1710,1434.8 R15.1
NetR16_1: R16.1 U3.10 | length 863.2
  Top Layer w6: U3.10 1705,2024.8 1850,2024.8 1850,1454.8 1800,1454.8 R16.1
NetR17_1: R17.1 R18.2 U4.5 | length 929.7
  Top Layer w6: v1(650,3105) 650,3180 720,3180 ; R17.1 720,3180 ; R18.2 810,3180 720,3180 ; v1(1005,2910) U4.5
  Bottom Layer w6: v1(650,3105) 1005,3105 v1(1005,2910)
NetU1_74: U1.74 U2.28 | length 532.6
  Top Layer w6: U1.74@1041.22,1188.78 1041.22,855.31 U2.28
NetU1_75: U1.75 U2.27 | length 460.6
  Top Layer w6: U1.75@1063.27,1188.78 1063.27,905.31 U2.27
USBD+: R10.2 U3.11 | length 875.2
  Top Layer w6: v1(1540,2509.8) R10.2 ; U3.11 1705,2114.8 v1(1790,2114.8)
  Bottom Layer w6: v1(1540,2509.8) 1575,2509.8 1575,2159.8 1790,2159.8 v1(1790,2114.8)
USBD-: R8.2 U3.12 | length 864.3
  Top Layer w6: v1(1630,2509.8) R8.2 ; U3.12 1680,2234.8 1780,2234.8 v1(1790,2224.8)
  Bottom Layer w6: v1(1630,2509.8) 1595,2509.8 1595,2179.8 1790,2179.8 v1(1790,2224.8)
pads on no net: J1.7 J2.2 J3.5 J3.6 J3.7 J3.8 J3.9 U1.6 U1.7 U1.8 U1.9 U1.13 U1.14 U1.16 U1.18 U1.20 U1.51 U1.52 U1.56 U1.57 U1.58 U1.59 U1.60 U1.61 U1.70 U1.73 U1.76 U1.77 U1.78 U1.79 U1.80 U1.81 U1.82 U1.85 U1.86 U1.87 U1.88 U1.89 U1.90 U1.91 U1.92 U1.93 U1.94 U1.95 U1.98 U1.99 U1.100 U2.9 U2.10 U2.11 U2.12 U2.17 U2.18 U2.19 U2.20 U2.21 U2.22 U2.24 U2.26 U2.32 U2.36 U2.37 U3.5 U3.7 U3.8 U3.9 U3.18 U3.19

## Polygon pours and split planes (outlines as drawn)
GND on Bottom Layer "Bottom Layer-GND" (solid, remove dead copper, pour order 4): 19.68,3335 2035,3335 2035,20 2034.68,19.68 19.68,19.68
no net on Bottom Layer "Bottom Layer-No Net" (solid, pour order 2): 30,3325

## Keep-outs
Keep-Out Layer:
  rectangle: 365,20 2035,315
  lines w10: 19.68,19.68 2035,19.68 2035,3335 19.68,3335 19.68,19.68

## Other copper
Top Layer:
  rectangle net GND: 895,2740 965,3000
  region: 909.8,2655.2
  region: 785,2630
  region: 715,2670
Bottom Layer:
  pour cut-out: 940,1270 1010,1270 1010,505.31 943.11,505.31 940,508.43
  pour cut-out: 695,1668.39 700,1673.39 700,1910 435,1910 430,1915 430,1770 435,1770 536.61,1668.39 693.39,1668.39 700,1675

## Silkscreen, mask and mechanical layers (free items; w line width, h text height)
Top Overlay:
  text "UTN ELCA IDCI" at 405,240 h50
  text "By G. Castro" at 405,160 h50
  text "Rev 2019" at 405,75 h50
Mechanical 1:
  the board outline again, w10